# EAGLE board f1 - Copy (EAGLE 9.5.0)
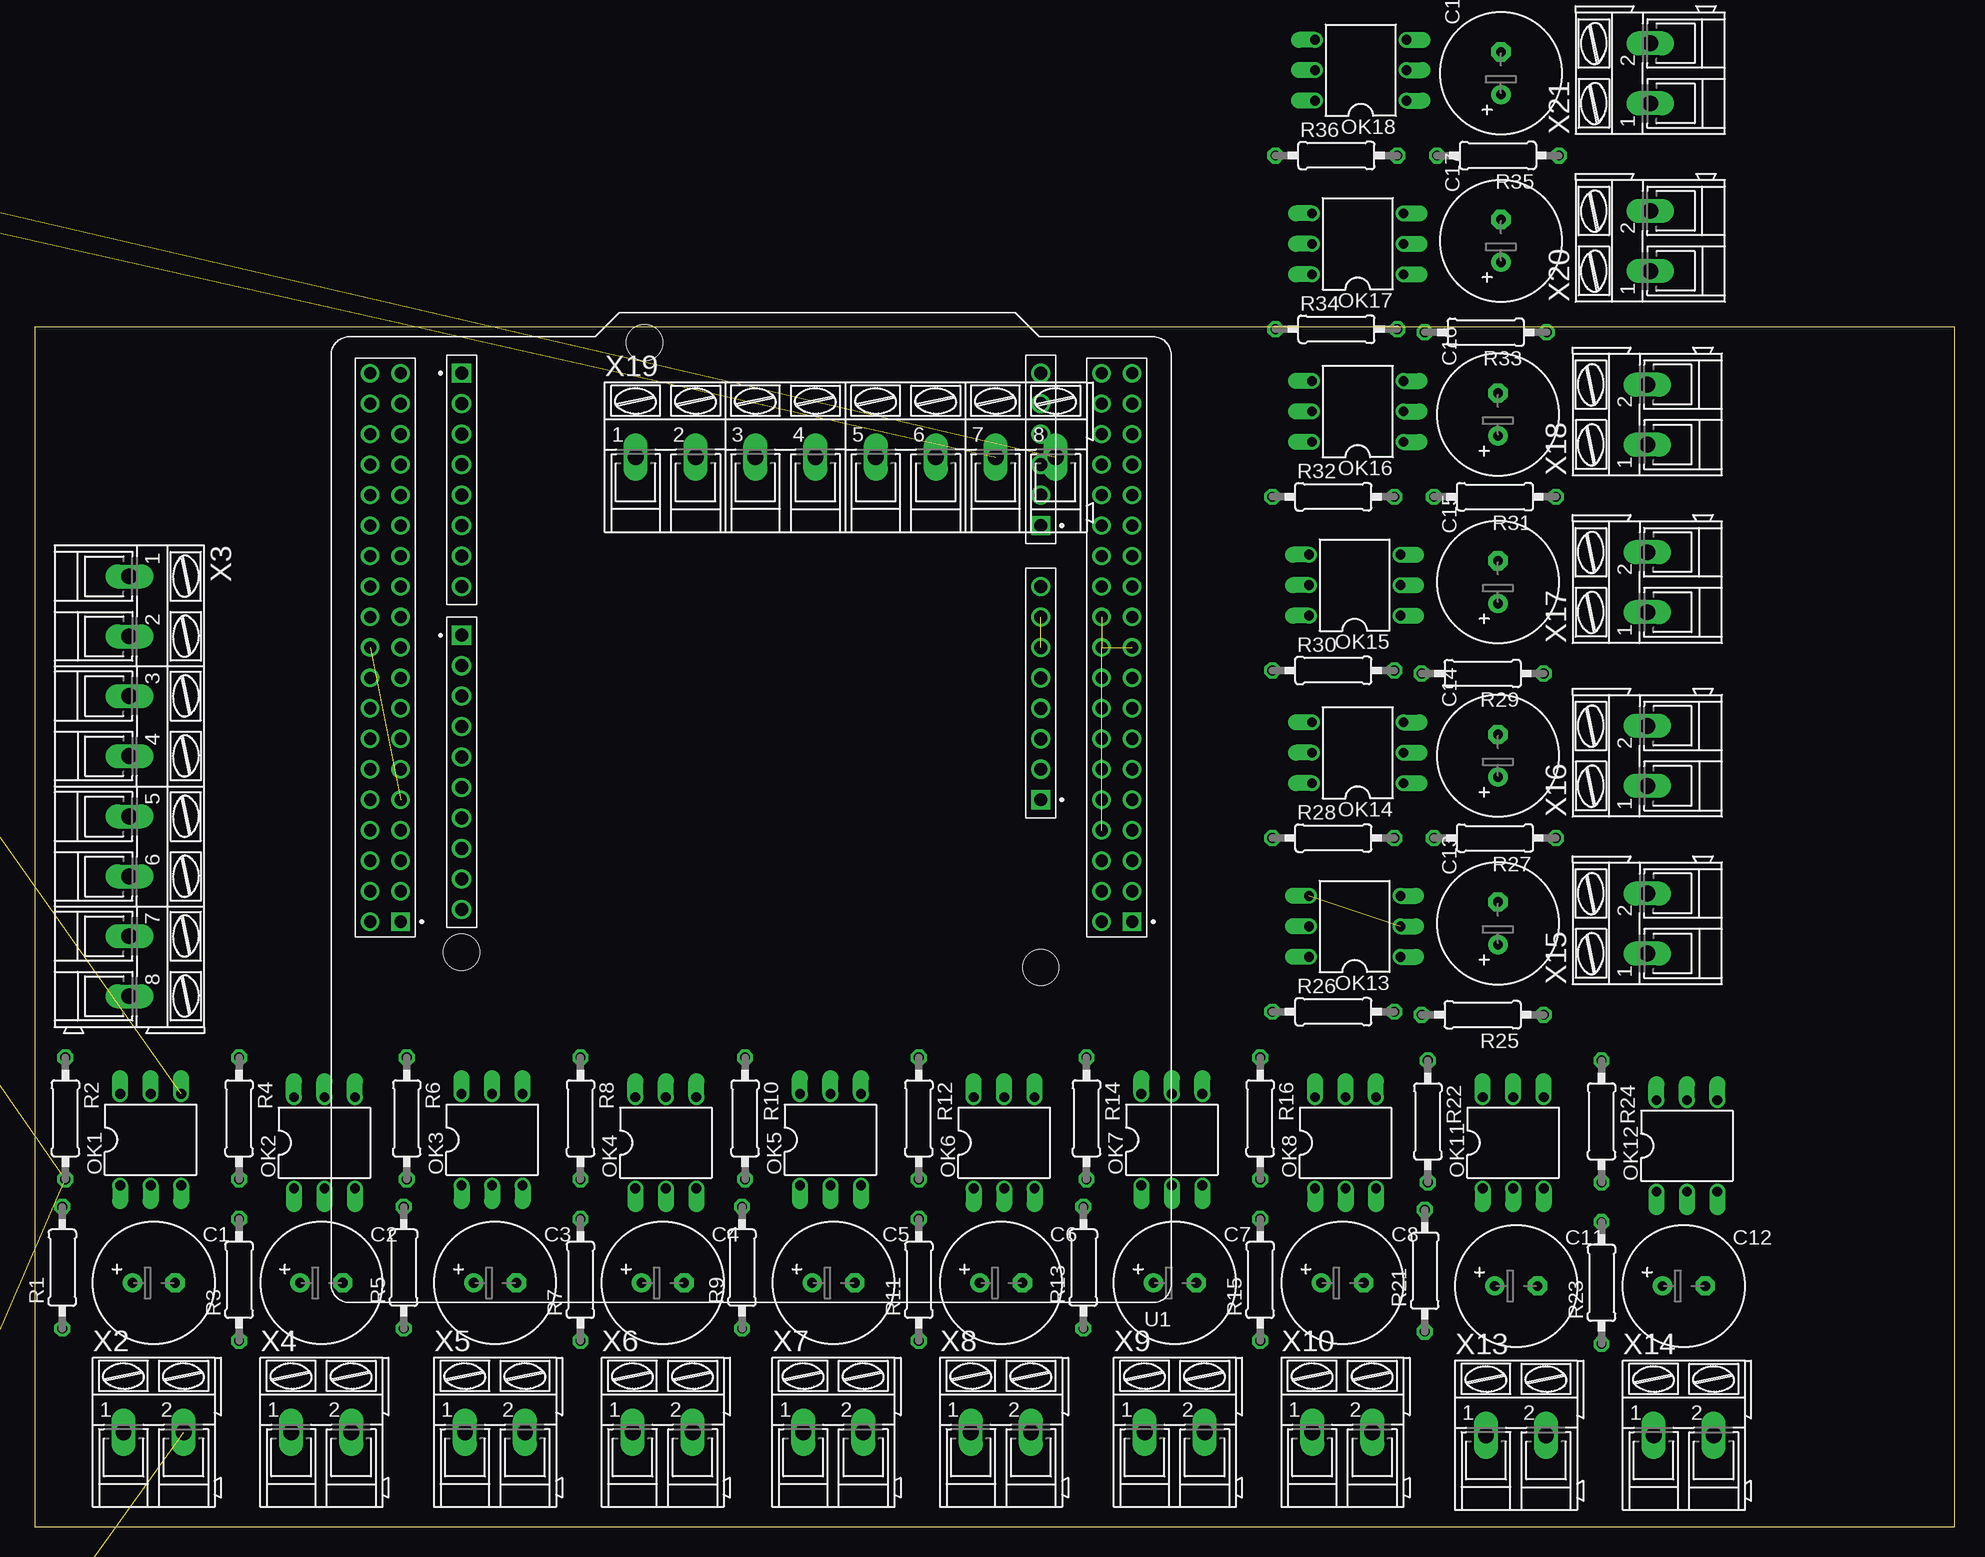
[diagram p0: board, top side]
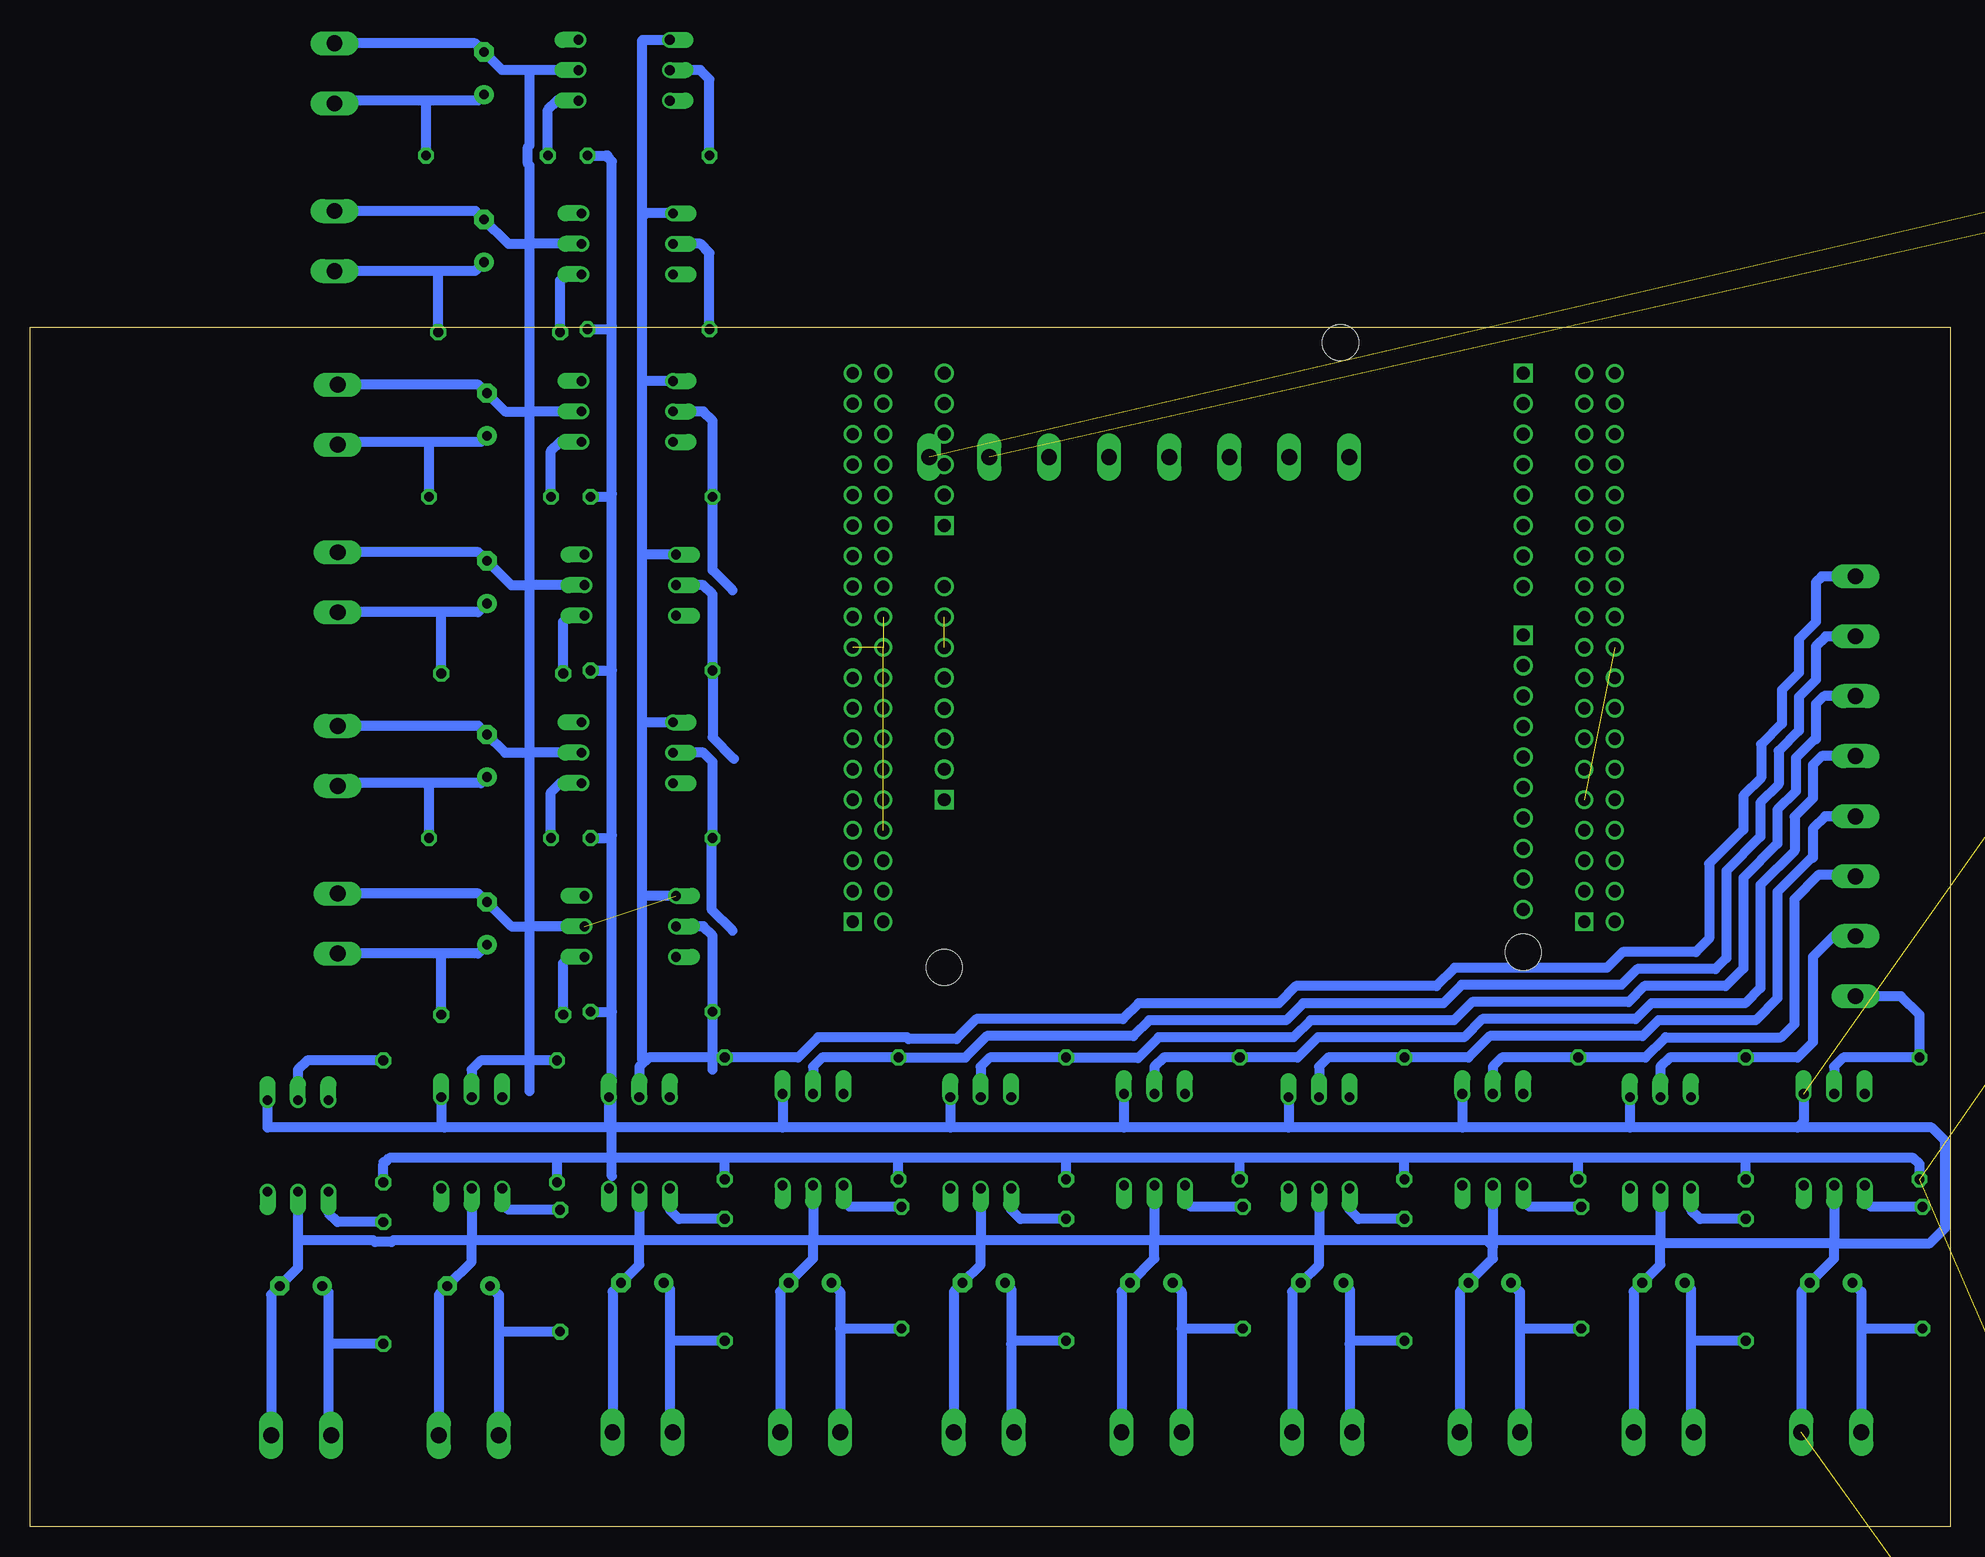
[diagram p1: board, bottom side, seen from below]

Size 160 x 100 mm. Coordinates in mm from the lower left corner, seen from the top.
Outline: 0,0 160,0 160,100 0,100 0,0
Copper layers (1*16): Top 0.035mm / dielectric 1.5mm / Bottom 0.035mm
Design rules "default": minimum track width 6mil, minimum drill 0.35mm, track to track 24mil, track to pad 24mil, pad to pad 24mil, via to via 24mil, smd to smd 24mil, copper to edge 40mil, drill to drill 6mil, minimum pad ring 10mil, minimum via ring 8mil, stop-mask expansion 4mil, vias tented up to drill 0mil, thermal gap 10mil

## Footprints (pad centres in the part's own frame; a part is rotated, then mirrored left to right if it is on the bottom)
E3,5-10 = drill 0.813 pad 1.6: + -1.778,0 | drill 0.813 pad 1.6 octagon: - 1.778,0
DIL06 = drill 0.813 offset: 1 -2.54,-3.81; 2 0,-3.81; 3 2.54,-3.81; 4 2.54,3.81; 5 0,3.81; 6 -2.54,3.81
0207/10 = drill 0.813 octagon: 1 -5.08,0; 2 5.08,0
MODULE_NUCLEO-F446RE = drill 1.07 square: CN5_1 24.13,-14.37; CN6_1 -24.13,-0.65; CN8_1 -24.13,-23.51; CN9_1 24.13,-36.21 | drill 1.07: CN5_2 24.13,-11.83; CN5_3 24.13,-9.29; CN5_4 24.13,-6.75; CN5_5 24.13,-4.21; CN5_6 24.13,-1.67; CN5_7 24.13,0.87; CN5_8 24.13,3.41; CN5_9 24.13,5.95; CN5_10 24.13,8.49; CN6_2 -24.13,-3.19; CN6_3 -24.13,-5.73; CN6_4 -24.13,-8.27; CN6_5 -24.13,-10.81; CN6_6 -24.13,-13.35; CN6_7 -24.13,-15.89; CN6_8 -24.13,-18.43; CN8_2 -24.13,-26.05; CN8_3 -24.13,-28.59; CN8_4 -24.13,-31.13; CN8_5 -24.13,-33.67; CN8_6 -24.13,-36.21; CN9_2 24.13,-33.67; CN9_3 24.13,-31.13; CN9_4 24.13,-28.59; CN9_5 24.13,-26.05; CN9_6 24.13,-23.51; CN9_7 24.13,-20.97; CN9_8 24.13,-18.43 | drill 1.02 square: CN7_1 -31.75,9.51; CN10_1 29.21,9.51 | drill 1.02: CN7_2 -29.21,9.51; CN7_3 -31.75,6.97; CN7_4 -29.21,6.97; CN7_5 -31.75,4.43; CN7_6 -29.21,4.43; CN7_7 -31.75,1.89; CN7_8 -29.21,1.89; CN7_9 -31.75,-0.65; CN7_10 -29.21,-0.65; CN7_11 -31.75,-3.19; CN7_12 -29.21,-3.19; CN7_13 -31.75,-5.73; CN7_14 -29.21,-5.73; CN7_15 -31.75,-8.27; CN7_16 -29.21,-8.27; CN7_17 -31.75,-10.81; CN7_18 -29.21,-10.81; CN7_19 -31.75,-13.35; CN7_20 -29.21,-13.35; CN7_21 -31.75,-15.89; CN7_22 -29.21,-15.89; CN7_23 -31.75,-18.43; CN7_24 -29.21,-18.43; CN7_25 -31.75,-20.97; CN7_26 -29.21,-20.97; CN7_27 -31.75,-23.51; CN7_28 -29.21,-23.51; CN7_29 -31.75,-26.05; CN7_30 -29.21,-26.05; CN7_31 -31.75,-28.59; CN7_32 -29.21,-28.59; CN7_33 -31.75,-31.13; CN7_34 -29.21,-31.13; CN7_35 -31.75,-33.67; CN7_36 -29.21,-33.67; CN7_37 -31.75,-36.21; CN7_38 -29.21,-36.21; CN10_2 31.75,9.51; CN10_3 29.21,6.97; CN10_4 31.75,6.97; CN10_5 29.21,4.43; CN10_6 31.75,4.43; CN10_7 29.21,1.89; CN10_8 31.75,1.89; CN10_9 29.21,-0.65; CN10_10 31.75,-0.65; CN10_11 29.21,-3.19; CN10_12 31.75,-3.19; CN10_13 29.21,-5.73; CN10_14 31.75,-5.73; CN10_15 29.21,-8.27; CN10_16 31.75,-8.27; CN10_17 29.21,-10.81; CN10_18 31.75,-10.81; CN10_19 29.21,-13.35; CN10_20 31.75,-13.35; CN10_21 29.21,-15.89; CN10_22 31.75,-15.89; CN10_23 29.21,-18.43; CN10_24 31.75,-18.43; CN10_25 29.21,-20.97; CN10_26 31.75,-20.97; CN10_27 29.21,-23.51; CN10_28 31.75,-23.51; CN10_29 29.21,-26.05; CN10_30 31.75,-26.05; CN10_31 29.21,-28.59; CN10_32 31.75,-28.59; CN10_33 29.21,-31.13; CN10_34 31.75,-31.13; CN10_35 29.21,-33.67; CN10_36 31.75,-33.67; CN10_37 29.21,-36.21; CN10_38 31.75,-36.21 | hole 3: 8.89,-38.75; 24.13,12.05; -24.13,13.32
AK300/2 = drill 1.321 long: 1 -2.515,0; 2 2.489,0
AK300/8 = drill 1.321 long: 1 -17.501,0; 2 -12.497,0; 3 -7.518,0; 4 -2.515,0; 5 2.515,0; 6 7.518,0; 7 12.497,0; 8 17.501,0

## Placement (x,y rotation side)
C1  [E3,5-10]  9.91,20.32 0 top
C2  [E3,5-10]  23.88,20.32 0 top
C3  [E3,5-10]  38.35,20.32 0 top
C4  [E3,5-10]  52.32,20.32 0 top
C5  [E3,5-10]  66.55,20.32 0 top
C6  [E3,5-10]  80.52,20.32 0 top
C7  [E3,5-10]  95,20.32 0 top
C8  [E3,5-10]  108.97,20.32 0 top
C9  [E3,5-10]  -109.22,149.86 0 top  (outside the outline)
C10  [E3,5-10]  -52.07,137.16 0 top  (outside the outline)
C11  [E3,5-10]  123.44,20.07 0 top
C12  [E3,5-10]  137.41,20.07 0 top
C13  [E3,5-10]  121.92,50.29 90 top
C14  [E3,5-10]  121.92,64.26 90 top
C15  [E3,5-10]  121.92,78.74 90 top
C16  [E3,5-10]  121.92,92.71 90 top
C17  [E3,5-10]  122.17,107.19 90 top  (outside the outline)
C18  [E3,5-10]  122.17,121.16 90 top  (outside the outline)
OK1  4N35  [DIL06]  9.65,32.26 0 top
OK2  4N35  [DIL06]  24.13,32 0 top
OK3  4N35  [DIL06]  38.1,32.26 0 top
OK4  4N35  [DIL06]  52.58,32 0 top
OK5  4N35  [DIL06]  66.29,32.26 0 top
OK6  4N35  [DIL06]  80.77,32 0 top
OK7  4N35  [DIL06]  94.74,32.26 0 top
OK8  4N35  [DIL06]  109.22,32 0 top
OK9  4N35  [DIL06]  -88.9,125.73 0 top  (outside the outline)
OK10  4N35  [DIL06]  -99.06,125.73 0 top  (outside the outline)
OK11  4N35  [DIL06]  123.19,32 0 top
OK12  4N35  [DIL06]  137.67,31.75 0 top
OK13  4N35  [DIL06]  109.98,50.04 90 top
OK14  4N35  [DIL06]  110.24,64.52 90 top
OK15  4N35  [DIL06]  109.98,78.49 90 top
OK16  4N35  [DIL06]  110.24,92.96 90 top
OK17  4N35  [DIL06]  110.24,106.93 90 top  (outside the outline)
OK18  4N35  [DIL06]  110.49,121.41 90 top  (outside the outline)
R1  [0207/10]  2.29,21.59 90 top
R2  [0207/10]  2.54,34.04 270 top
R3  [0207/10]  17.02,20.57 90 top
R4  [0207/10]  17.02,34.04 270 top
R5  [0207/10]  30.73,21.59 90 top
R6  [0207/10]  30.99,34.04 270 top
R7  [0207/10]  45.47,20.57 90 top
R8  [0207/10]  45.47,34.04 270 top
R9  [0207/10]  58.93,21.59 90 top
R10  [0207/10]  59.18,34.04 270 top
R11  [0207/10]  73.66,20.57 90 top
R12  [0207/10]  73.66,34.04 270 top
R13  [0207/10]  87.38,21.59 90 top
R14  [0207/10]  87.63,34.04 270 top
R15  [0207/10]  102.11,20.57 90 top
R16  [0207/10]  102.11,34.04 270 top
R17  [0207/10]  -82.55,162.56 0 top  (outside the outline)
R18  [0207/10]  -95.25,162.56 0 top  (outside the outline)
R19  [0207/10]  -107.95,162.56 0 top  (outside the outline)
R20  [0207/10]  -120.65,162.56 0 top  (outside the outline)
R21  [0207/10]  115.82,21.34 90 top
R22  [0207/10]  116.08,33.78 270 top
R23  [0207/10]  130.56,20.32 90 top
R24  [0207/10]  130.56,33.78 270 top
R25  [0207/10]  120.65,42.67 180 top
R26  [0207/10]  108.2,42.93 0 top
R27  [0207/10]  121.67,57.4 180 top
R28  [0207/10]  108.2,57.4 0 top
R29  [0207/10]  120.65,71.12 180 top
R30  [0207/10]  108.2,71.37 0 top
R31  [0207/10]  121.67,85.85 180 top
R32  [0207/10]  108.2,85.85 0 top
R33  [0207/10]  120.9,99.57 180 top
R34  [0207/10]  108.46,99.82 0 top
R35  [0207/10]  121.92,114.3 180 top  (outside the outline)
R36  [0207/10]  108.46,114.3 0 top  (outside the outline)
U1  NUCLEO-F446RE  [MODULE_NUCLEO-F446RE]  59.69,59.94 180 top
X1  [AK300/2]  -25.4,-41.4 0 top  (outside the outline)
X2  [AK300/2]  9.91,7.87 0 top
X3  [AK300/8]  7.87,61.72 270 top
X4  [AK300/2]  23.88,7.87 0 top
X5  [AK300/2]  38.35,7.87 0 top
X6  [AK300/2]  52.32,7.87 0 top
X7  [AK300/2]  66.55,7.87 0 top
X8  [AK300/2]  80.52,7.87 0 top
X9  [AK300/2]  95,7.87 0 top
X10  [AK300/2]  108.97,7.87 0 top
X11  [AK300/2]  -41.91,109.22 0 top  (outside the outline)
X12  [AK300/2]  -53.34,109.22 0 top  (outside the outline)
X13  [AK300/2]  123.44,7.62 0 top
X14  [AK300/2]  137.41,7.62 0 top
X15  [AK300/2]  134.37,50.29 90 top
X16  [AK300/2]  134.37,64.26 90 top
X17  [AK300/2]  134.37,78.74 90 top
X18  [AK300/2]  134.37,92.71 90 top
X19  [AK300/8]  67.56,89.15 0 top
X20  [AK300/2]  134.62,107.19 90 top  (outside the outline)
X21  [AK300/2]  134.62,121.16 90 top  (outside the outline)

## Library data of the parts
C1-C18 = rcl; SPICEPREFIX: C
OK1-OK18 = optocoupler; MF: FAIRCHILD SEMICONDUCTOR; MPN: 4N35; OC_FARNELL: 1328375; OC_NEWARK: 72K9946
R1-R36 = rcl; SPICEPREFIX: R
U1 = NUCLEO-F446RE; AVAILABILITY: Warning; DESCRIPTION: STM32F446RE, mbed-Enabled Development Nucleo-64 STM32F4 ARM® Cortex®-M4 MCU 32-Bit Embedded Evaluation Board; MF: STMicroelectronics; MP: NUCLEO-F446RE; PACKAGE: None; PRICE: None; PURCHASE-URL: https://pricing.snapeda.com/search/part/NUCLEO-F446RE/?ref=eda
X1-X21 = con-ptr500; OC_FARNELL: unknown; OC_NEWARK: unknown

## Nets
1: OK1.5 R2.1 X3.8
2: OK2.5 R4.1 X3.7
3: OK16.5 R32.1
4: OK4.5 R8.1 X3.5
5: OK14.5 R28.1
5V: R2.2 R4.2 R6.2 R8.2 R10.2 R12.2 R14.2 R16.2 R18.2 R20.2 R22.2 R24.2 X1.1
5V1: R26.2 R28.2 R30.2 R32.2 R34.2 R36.2
6: OK15.5 R30.1
7: OK17.5 R34.1
8: OK8.5 R16.1 X3.1
9: OK9.5 R18.1 X19.8
10: OK10.5 R20.1 X19.7
11: X19.6
12: X19.5
13: X19.4
14: X19.3
15: X19.2
16: X19.1
17: OK18.5 R36.1
19: OK3.5 R6.1 X3.6
20: OK6.5 R12.1 X3.3
21: OK7.5 R14.1 X3.2
23: OK11.5 R22.1
24: OK12.5 R24.1
AGND: U1.CN10_32
AREF: U1.CN5_8
AVDD: U1.CN10_7
CN5_GND: U1.CN5_7
CN6_+3V3: U1.CN6_4
CN6_+5V: U1.CN6_5
CN6_GND: U1.CN6_6 U1.CN6_7
CN6_VIN: U1.CN6_8
CN7_+3V3: U1.CN7_16
CN7_+5V: U1.CN7_18
CN7_GND: U1.CN7_8 U1.CN7_19 U1.CN7_20 U1.CN7_22
CN7_VIN: U1.CN7_24
CN10_GND: U1.CN10_9 U1.CN10_20
E5V: U1.CN7_6
GND: C1.- C2.- C3.- C4.- C5.- C6.- C7.- C8.- C9.- C10.- C11.- C12.- OK1.2 OK1.4 OK2.2 OK2.4 OK3.2 OK3.4 OK4.2 OK4.4 OK5.2 OK5.4 OK6.2 OK6.4 OK7.2 OK7.4 OK8.2 OK8.4 OK9.2 OK9.4 OK10.2 OK10.4 OK11.2 OK11.4 OK12.2 OK12.4 X1.2 X2.2 X4.2 X5.2 X6.2 X7.2 X8.2 X9.2 X10.2 X11.2 X12.2 X13.2 X14.2
GND1: C13.- C14.- C15.- C16.- C17.- C18.- OK13.2 OK13.4 OK14.2 OK14.4 OK15.2 OK15.4 OK16.2 OK16.4 OK17.2 OK17.4 OK18.2 OK18.4 X15.2 X16.2 X17.2 X18.2 X20.2 X21.2
N$1: C2.+ R3.1 X4.1
N$2: OK2.1 R3.2
N$3: C3.+ R5.1 X5.1
N$4: OK3.1 R5.2
N$5: C4.+ R7.1 X6.1
N$6: C1.+ R1.1 X2.1
N$7: OK1.1 R1.2
N$8: OK4.1 R7.2
N$9: C5.+ R9.1 X7.1
N$10: OK5.1 R9.2
N$11: C6.+ R11.1 X8.1
N$12: OK6.1 R11.2
N$13: C7.+ R13.1 X9.1
N$14: OK7.1 R13.2
N$15: C8.+ R15.1 X10.1
N$16: OK8.1 R15.2
N$17: C11.+ R21.1 X13.1
N$18: OK11.1 R21.2
N$19: C12.+ R23.1 X14.1
N$20: OK12.1 R23.2
N$21: C13.+ R25.1 X15.1
N$22: OK13.1 R25.2
N$23: C14.+ R27.1 X16.1
N$24: C9.+ R17.1 X11.1
N$25: OK9.1 R17.2
N$26: C10.+ R19.1 X12.1
N$27: OK10.1 R19.2
N$28: OK14.1 R27.2
N$29: C15.+ R29.1 X17.1
N$30: OK15.1 R29.2
N$31: C16.+ R31.1 X18.1
N$32: OK16.1 R31.2
N$33: C17.+ R33.1 X20.1
N$34: OK17.1 R33.2
N$35: C18.+ R35.1 X21.1
N$36: OK18.1 R35.2
S$1: OK5.5 R10.1 X3.4
S$2: OK13.5 R26.1
U5V: U1.CN10_8
VBAT: U1.CN7_33
VDD: U1.CN7_5

## Tracks (layer width: path | path; a pad name or v marks a point on that pad's centre or on a via)
1
  Bottom 0.813: OK1.5 9.65,38.35 8.89,39.12 R2.1 2.54,42.67 4.09,44.22 X3.8
2
  Bottom 0.813: OK2.5 24.13,38.35 23.37,39.12 R4.1 12.7,39.12 11.43,40.39 11.43,47.5 9.7,49.23 X3.7
3
  Bottom 0.813: OK16.5 103.89,92.96 103.12,92.2 R32.1 103.12,79.74 101.45,78.06
4
  Bottom 0.813: OK4.5 52.58,38.35 51.82,39.12 R8.1 40.13,39.12 38.35,40.89 25.61,40.89 24.29,42.22 16.2,42.22 14.38,44.04 14.38,52.91 11.51,55.78 11.43,55.78 11.43,58.19 10.41,59.21 X3.5
5
  Bottom 0.813: OK14.5 103.89,64.52 103.12,63.75 R28.1 103.17,57.35 103.17,51.41 101.45,49.68
5V  (3 unrouted)
  Bottom 0.813: 17.27,30.73 3.05,30.73 2.54,30.23 R2.2 | 17.27,30.73 30.99,30.73 | 30.99,30.73 45.47,30.73 | 45.47,30.73 59.18,30.73 | 59.18,30.73 73.91,30.73 | 73.91,30.73 87.63,30.73 | 87.63,30.73 102.36,30.73 | 102.36,30.73 116.33,30.73 | 116.33,30.73 130.05,30.73 130.4,30.38 | 130.4,30.38 130.56,30.38 | R4.2 17.02,30.48 17.27,30.73 | R6.2 30.99,30.73 | R8.2 45.47,30.73 | R10.2 59.18,30.73 | R12.2 73.66,30.48 73.91,30.73 | R14.2 87.63,30.73 | R16.2 102.11,30.48 102.36,30.73 | R22.2 116.08,30.48 116.33,30.73 | R24.2 130.56,30.23 130.4,30.38
5V1
  Bottom 0.813: 111.51,29.21 111.51,42.93 | 111.51,42.93 111.51,57.66 | 111.51,57.66 111.51,71.37 | 111.51,71.37 111.51,86.11 | 111.51,86.11 111.51,100.08 | 111.51,100.08 111.51,113.79 111.86,114.15 | 111.86,114.15 111.86,114.3 | R26.2 111.51,42.93 | R28.2 111.76,57.4 111.51,57.66 | R30.2 111.51,71.37 | R32.2 111.76,85.85 111.51,86.11 | R34.2 111.76,99.82 111.51,100.08 | R36.2 112.01,114.3 111.86,114.15
6
  Bottom 0.813: OK15.5 103.89,78.49 103.12,77.72 R30.1 103.12,65.79 101.35,64.01
7
  Bottom 0.813: R34.1 103.38,106.17 104.14,106.93 OK17.5
8
  Bottom 0.813: OK8.5 109.22,38.35 108.46,39.12 R16.1 95.99,39.12 94.31,40.79 86.94,40.79 86.78,40.64 82.8,40.64 81.13,42.32 68.94,42.32 67.61,43.64 55.93,43.64 54.51,45.06 42.8,45.06 41.28,46.58 28.6,46.58 27.28,47.9 21.18,47.9 20.07,49.02 20.07,55.27 17.22,58.12 17.22,60.95 15.75,62.42 15.75,65.22 14.02,66.94 14.02,69.76 12.6,71.18 12.6,74 11.18,75.42 11.18,78.74 10.69,79.22 X3.1
9  (2 unrouted)
10  (2 unrouted)
17
  Bottom 0.813: R36.1 103.38,120.65 104.14,121.41 OK18.5
19
  Bottom 0.813: OK3.5 38.1,38.35 37.34,39.12 R6.1 25.38,39.12 23.7,40.79 14.07,40.79 12.95,41.91 12.95,52.32 10.92,54.36 8.03,54.36 X3.6
20
  Bottom 0.813: OK6.5 80.77,38.35 80.01,39.12 R12.1 73.61,39.06 67.67,39.06 65.94,40.79 54.71,40.79 53.29,42.22 41.35,42.22 39.83,43.74 26.79,43.74 25.47,45.06 18.69,45.06 17.22,46.53 17.22,54.09 14.38,56.94 14.38,59.77 12.85,61.3 12.85,64.09 11.28,65.66 11.18,65.66 11.18,68.58 10.52,69.24 X3.3
21
  Bottom 0.813: OK7.5 94.74,38.35 93.98,39.12 R14.1 82.04,39.12 80.26,40.89 68.05,40.89 66.73,42.22 55.32,42.22 53.9,43.64 42.22,43.64 40.69,45.16 27.38,45.16 26.06,46.48 19.56,46.48 18.64,47.4 18.64,54.68 15.8,57.53 15.8,60.36 14.28,61.88 14.28,64.68 12.6,66.36 12.6,69.17 11.18,70.59 11.18,73.41 10.36,74.22 X3.2
23
  Bottom 0.813: R22.1 122.43,38.86 123.19,38.1 OK11.5
24
  Bottom 0.813: R24.1 136.91,38.86 137.67,38.1 OK12.5
CN6_GND  (1 unrouted)
CN7_GND  (3 unrouted)
CN10_GND  (1 unrouted)
GND  (9 unrouted)
  Bottom 0.813: X2.2 12.39,19.61 C1.- 9.65,22.35 9.65,23.62 | OK1.2 9.65,23.62 | X4.2 26.36,19.61 C2.- 24.13,21.84 24.13,23.62 | OK2.2 24.13,23.62 | X5.2 40.84,19.61 C3.- 38.1,22.35 38.1,23.37 | OK3.2 38.1,23.88 | 38.1,23.88 38.1,23.37 | X6.2 54.81,19.61 C4.- 52.58,21.84 52.58,23.88 | OK4.2 52.58,23.88 | X7.2 69.04,19.61 C5.- 66.29,22.35 66.29,23.88 | OK5.2 66.29,23.88 | X8.2 83.01,19.61 C6.- 80.77,21.84 80.77,23.88 | OK6.2 80.77,23.88 | X9.2 97.48,19.61 C7.- 94.74,22.35 94.74,23.88 | OK7.2 94.74,23.88 | X10.2 111.45,19.61 C8.- 109.22,21.84 109.22,23.88 | OK8.2 109.22,23.88 | X13.2 125.93,19.36 C11.- 123.19,22.1 123.19,23.88 | OK11.2 123.19,23.88 | X14.2 139.9,19.36 C12.- 137.67,21.59 137.67,23.88 | OK12.2 137.67,23.88 | OK1.4 12.19,33.78 12.7,33.27 | 12.7,33.27 26.67,33.27 | 26.67,33.27 40.64,33.27 | 40.64,33.27 55.12,33.27 | 55.12,33.27 68.83,33.27 | 68.83,33.27 83.31,33.27 | 83.31,33.27 97.28,33.27 | 97.28,33.27 111.51,33.27 | 111.51,33.27 125.48,33.27 | 125.48,33.27 140.21,33.27 OK12.4 | OK11.4 125.73,33.53 125.48,33.27 | OK8.4 111.76,33.53 111.51,33.27 | OK7.4 97.28,33.27 | OK6.4 83.31,33.27 | OK5.4 68.83,33.27 | OK4.4 55.12,33.27 | OK3.4 40.64,33.27 | OK2.4 26.67,33.27 | 9.65,23.62 1.68,23.62 0.41,24.89 0.41,32.16 1.52,33.27 12.7,33.27 | 9.65,23.62 24.13,23.62 | 24.13,23.62 24.38,23.88 38.1,23.88 | 38.1,23.37 38.61,23.88 52.58,23.88 | 52.58,23.88 66.29,23.88 | 66.29,23.88 80.77,23.88 | 80.77,23.88 94.74,23.88 | 94.74,23.88 109.22,23.88 | 109.22,23.88 123.19,23.88 | 123.19,23.88 129.71,23.88 129.86,23.72 131.25,23.72 131.4,23.88 137.67,23.88
GND1  (1 unrouted)
  Bottom 0.813: X15.2 122.63,52.78 C13.- 119.89,50.04 118.36,50.04 | OK13.2 118.36,50.04 | X16.2 122.63,66.75 C14.- 120.4,64.52 118.36,64.52 | OK14.2 118.36,64.52 | X17.2 122.63,81.23 C15.- 119.89,78.49 118.36,78.49 | OK15.2 118.36,78.49 | X18.2 122.63,95.2 C16.- 120.4,92.96 118.36,92.96 | OK16.2 118.36,92.96 | X20.2 122.89,109.68 C17.- 120.14,106.93 118.36,106.93 | OK17.2 118.36,106.93 | X21.2 122.89,123.65 C18.- 120.65,121.41 118.36,121.41 | OK18.2 118.36,121.41 | 108.97,38.86 108.97,52.58 | 108.97,52.58 108.97,67.06 | 108.97,67.06 108.97,81.03 | 108.97,81.03 108.97,95.25 | 108.97,95.25 108.97,109.22 | 108.97,109.22 108.97,123.95 OK18.4 | OK17.4 108.71,109.47 108.97,109.22 | OK16.4 108.71,95.5 108.97,95.25 | OK15.4 108.97,81.03 | OK14.4 108.97,67.06 | OK13.4 108.97,52.58 | 118.36,36.32 118.36,50.04 | 118.36,50.04 118.36,64.52 | 118.36,64.52 118.36,78.49 | 118.36,78.49 118.36,92.96 | 118.36,92.96 118.36,106.93 | 118.36,106.93 118.36,113.45 118.52,113.61 118.52,114.99 118.36,115.15 118.36,121.41
N$1
  Bottom 0.813: C2.+ 21.59,19.81 21.59,15.24 | 21.59,15.24 21.59,7.11 21.36,7.34 X4.1 | R3.1 21.34,15.49 21.59,15.24
N$2
  Bottom 0.813: R3.2 20.83,25.65 21.59,26.42 OK2.1
N$3
  Bottom 0.813: C3.+ 35.84,19.58 35.84,16.51 | 35.84,16.51 X5.1 | R5.1 35.84,16.51
N$4
  Bottom 0.813: R5.2 35.05,26.67 35.56,27.18 OK3.1
N$5
  Bottom 0.813: C4.+ 50.04,19.81 50.04,15.24 | 50.04,15.24 50.04,7.11 49.81,7.34 X6.1 | R7.1 49.78,15.49 50.04,15.24
N$6
  Bottom 0.813: C1.+ 7.39,19.58 7.39,16.51 | 7.39,16.51 X2.1 | R1.1 7.39,16.51
N$7
  Bottom 0.813: R1.2 6.6,26.67 7.11,27.18 OK1.1
N$8
  Bottom 0.813: R7.2 49.28,25.65 50.04,26.42 OK4.1
N$9
  Bottom 0.813: C5.+ 64.03,19.58 64.03,16.51 | 64.03,16.51 X7.1 | R9.1 64.03,16.51
N$10
  Bottom 0.813: R9.2 63.25,26.67 63.75,27.18 OK5.1
N$11
  Bottom 0.813: C6.+ 78.23,19.81 78.23,15.24 | 78.23,15.24 78.23,7.11 78,7.34 X8.1 | R11.1 77.98,15.49 78.23,15.24
N$12
  Bottom 0.813: R11.2 77.47,25.65 78.23,26.42 OK6.1
N$13
  Bottom 0.813: C7.+ 92.48,19.58 92.48,16.51 | 92.48,16.51 X9.1 | R13.1 92.48,16.51
N$14
  Bottom 0.813: R13.2 91.69,26.67 92.2,27.18 OK7.1
N$15
  Bottom 0.813: C8.+ 106.68,19.81 106.68,15.24 | 106.68,15.24 106.68,7.11 106.45,7.34 X10.1 | R15.1 106.43,15.49 106.68,15.24
N$16
  Bottom 0.813: R15.2 105.92,25.65 106.68,26.42 OK8.1
N$17
  Bottom 0.813: C11.+ 120.93,19.33 120.93,16.26 | 120.93,16.26 X13.1 | R21.1 120.93,16.26
N$18
  Bottom 0.813: R21.2 120.14,26.42 120.65,26.92 OK11.1
N$19
  Bottom 0.813: C12.+ 135.13,19.56 135.13,14.99 | 135.13,14.99 135.13,6.86 134.9,7.09 X14.1 | R23.1 134.87,15.24 135.13,14.99
N$20
  Bottom 0.813: R23.2 134.37,25.4 135.13,26.16 OK12.1
N$21
  Bottom 0.813: C13.+ 122.66,47.78 125.73,47.78 | 125.73,47.78 X15.1 | R25.1 125.73,47.78
N$22
  Bottom 0.813: R25.2 115.57,46.99 115.06,47.5 OK13.1
N$23
  Bottom 0.813: C14.+ 122.43,61.98 127,61.98 | 127,61.98 135.13,61.98 134.9,61.75 X16.1 | R27.1 126.75,61.72 127,61.98
N$24  (2 unrouted)
N$25  (1 unrouted)
N$26  (2 unrouted)
N$27  (1 unrouted)
N$28
  Bottom 0.813: R27.2 116.59,61.21 115.82,61.98 OK14.1
N$29
  Bottom 0.813: C15.+ 122.66,76.22 125.73,76.22 | 125.73,76.22 X17.1 | R29.1 125.73,76.22
N$30
  Bottom 0.813: R29.2 115.57,75.44 115.06,75.95 OK15.1
N$31
  Bottom 0.813: C16.+ 122.43,90.42 127,90.42 | 127,90.42 135.13,90.42 134.9,90.19 X18.1 | R31.1 126.75,90.17 127,90.42
N$32
  Bottom 0.813: R31.2 116.59,89.66 115.82,90.42 OK16.1
N$33
  Bottom 0.813: C17.+ 122.91,104.67 125.98,104.67 | 125.98,104.67 X20.1 | R33.1 125.98,104.67
N$34
  Bottom 0.813: R33.2 115.82,103.89 115.32,104.39 OK17.1
N$35
  Bottom 0.813: C18.+ 122.68,118.87 127.25,118.87 | 127.25,118.87 135.38,118.87 135.15,118.64 X21.1 | R35.1 127,118.62 127.25,118.87
N$36
  Bottom 0.813: R35.2 116.84,118.11 116.08,118.87 OK18.1
S$1
  Bottom 0.813: OK5.5 66.29,38.35 65.53,39.12 R10.1 54.36,39.12 52.68,40.79 40.49,40.79 38.96,42.32 26.2,42.32 24.88,43.64 17.07,43.64 15.8,44.91 15.8,53.5 12.95,56.35 12.95,59.18 11.43,60.71 11.43,63.5 10.69,64.24 X3.4
S$2
  Bottom 0.813: OK13.5 103.89,50.04 103.12,49.28 R26.1 103.12,38.1